# Altium PCB Driver.PcbDoc
Units mil, origin at the board's own origin, x right, y up, seen from the top; angles counter-clockwise.
Board outline 3410 x 1963 mil, 2 copper layers (Top Layer, Bottom Layer); 42 components, 50 nets, 167 pads, 24 vias.
Unrouted connection lines stored in the file: 40.
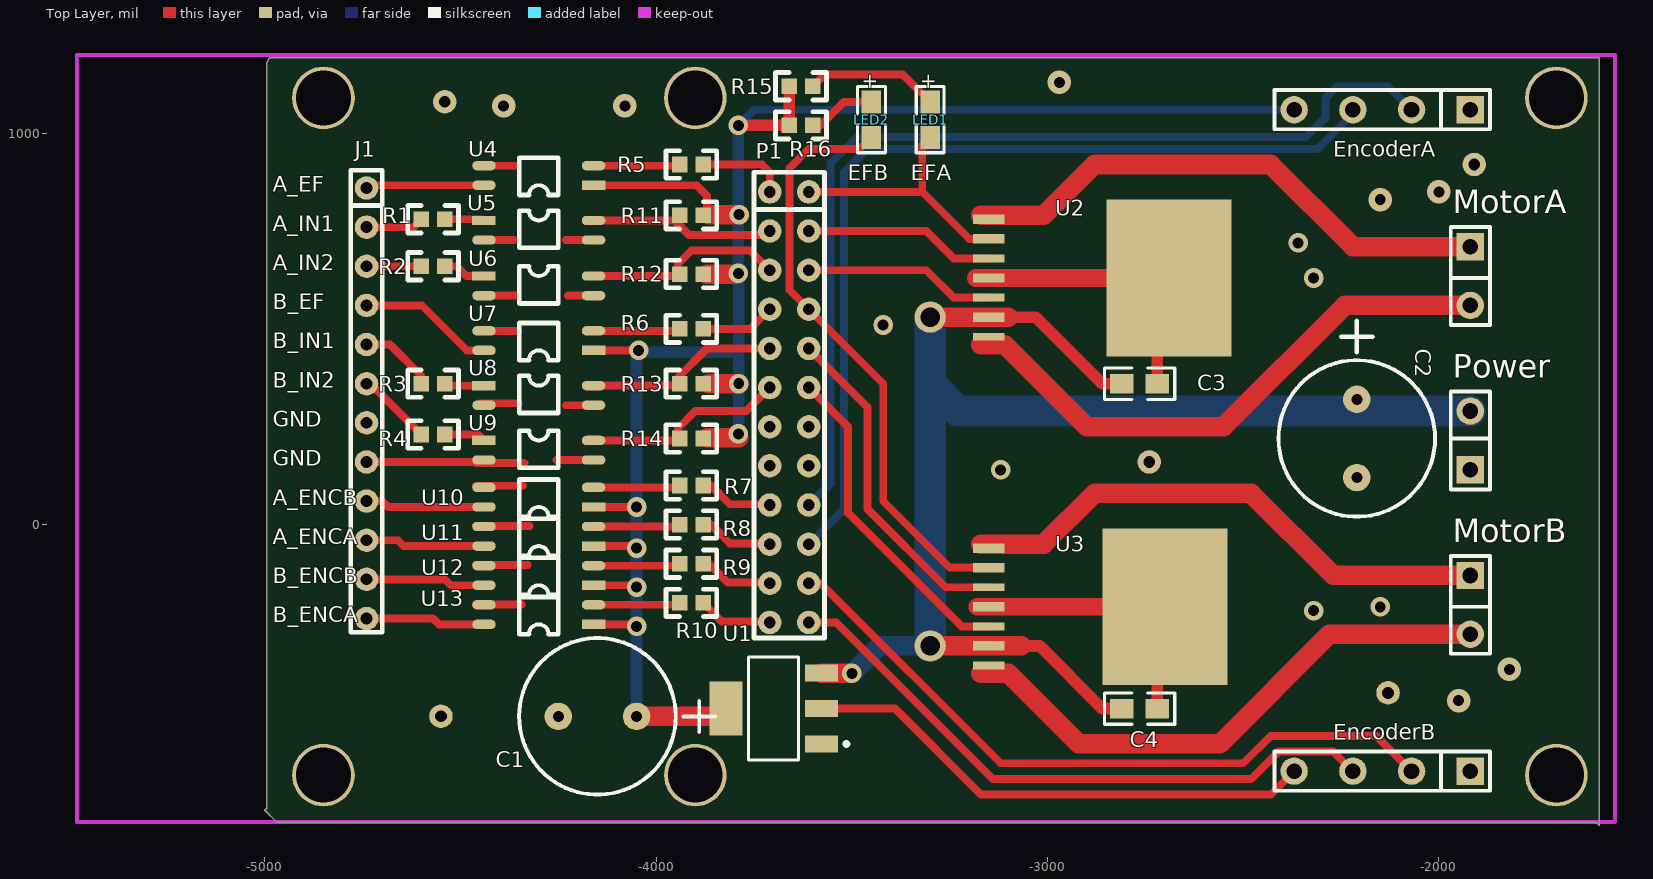
[diagram p0: Top Layer view]
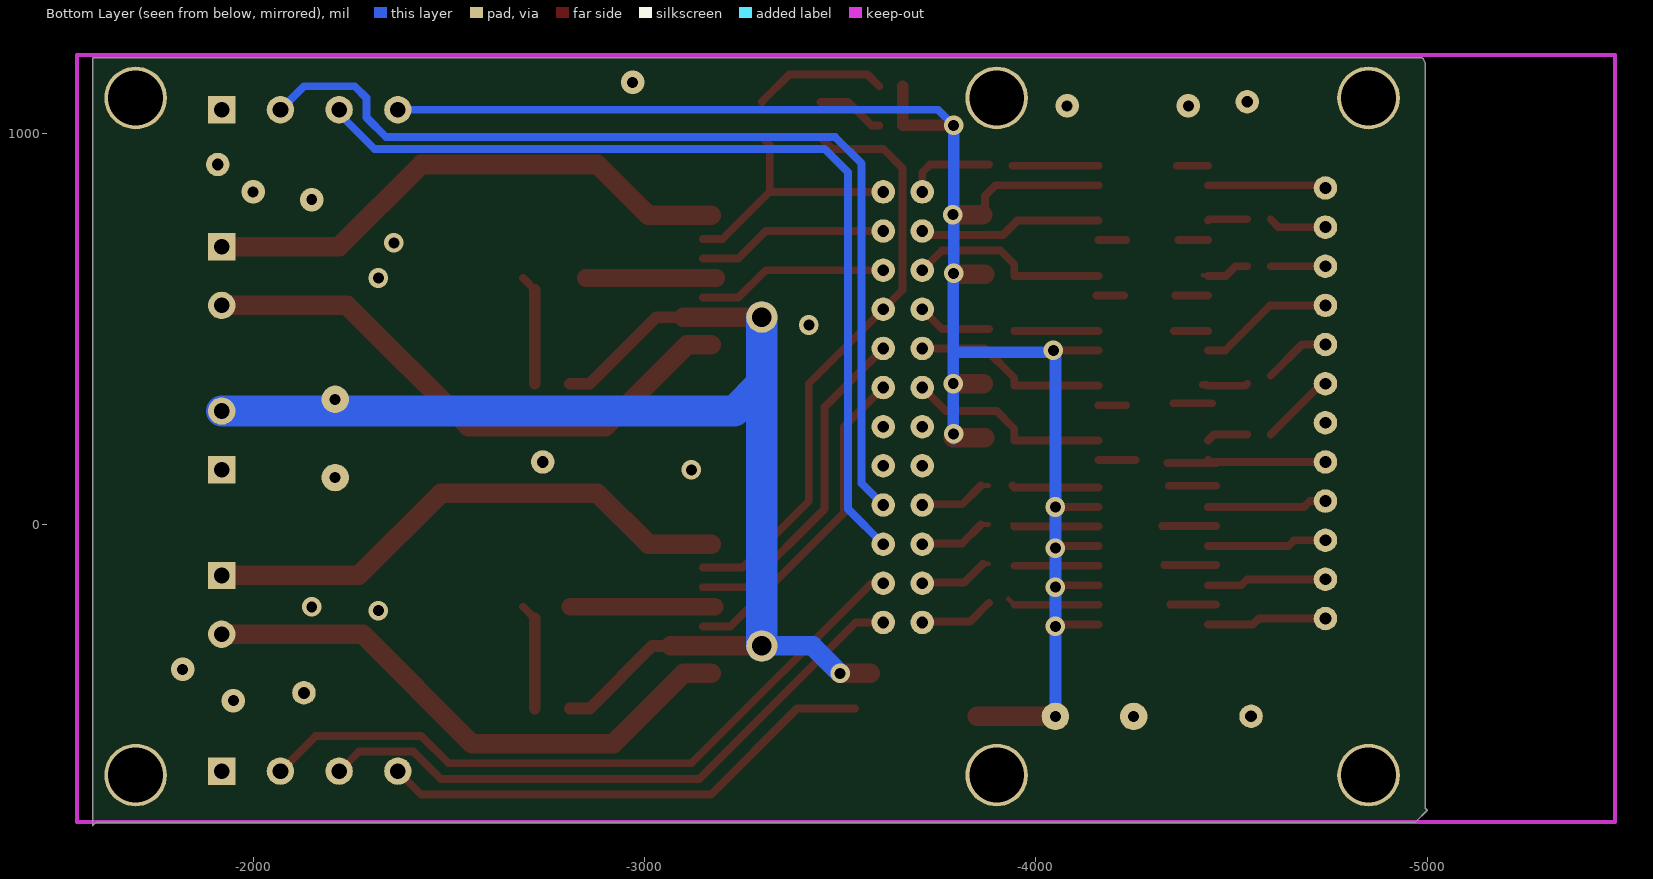
[diagram p1: Bottom Layer view, seen from below]

## Layer stack, top to bottom
Top Solder: solder mask 0.4, Solder Resist, Dk 3.5
Top Layer: signal copper 1.4
Dielectric1: dielectric 12.6, FR-4, Dk 4.8
Bottom Layer: signal copper 1.4
Bottom Solder: solder mask 0.4, Solder Resist, Dk 3.5

## Board outline
-4990,1190 -4987,1193 -1590,1193 -1590,-770 -1600,-760 -3320,-760 -4970,-760 -5000,-730 -4995,-725 -4995,1180

## Design rules (kind name [scope] priority, off if disabled: settings)
Clearance PAD_PAD [All] p1: gap=5
Clearance [All] p2: gap=11.81
FabricationTestPointUsage TestPointUsage [All] p1: valid=0 allowmultiple=FALSE
FabricationTestpoint Testpoint [All] p1: side=3 testpointundercomponent=TRUE minsize=40 maxsize=100 preferedsize=60 minholesize=0 maxholesize=40 preferedholesize=32 testpointgrid=1 allowsidetop=TRUE allowsidebottom=TRUE usegrid=TRUE gridtolerance=0.01
PolygonConnect [All] p1: connectstyle=Relief reliefconductorwidth=10 reliefentries=4 polygonreliefangle="90 Angle" airgapwidth=10
RoutingVias [All] p1: holewidth=15.75 width=50 viastyle="Through Hole" minholewidth=11.81 minwidth=50 maxholewidth=19.68 maxwidth=50
SolderMaskExpansion [All] p1: expansion=4
Width gnd [InNet('GND')] p1: maxlimit=200 minlimit=20 preferedwidth=20
Width singal [All] p2: maxlimit=200 minlimit=12 preferedwidth=20
Width vcc [InNet('VCC')] p3: maxlimit=120 minlimit=50 preferedwidth=120
27 further rules are at their usual default settings.

## Components (designator, comment, footprint, x,y, rotation, side; value= is the part's Value field where it differs from the comment)
C1 "22uF" RB.2/.4 -4150,-490 r0 top
C2 "10uF" RB.2/.4 -2210,220 r90 top
C3 "100nF" 0805 -2810,360 r0 top
C4 "100nF" 0805 -2810,-470 r0 top
EncoderA "EncoderA" SIP4-150 -1920,1060 r180 top
EncoderB "EncoderB" SIP4-150 -1920,-630 r180 top
J1 "CON12" si12 -4640,-40 r0 top
LED1 "EFA" LED-0805 -3300,1080 r270 top
LED2 "EFB" LED-0805 -3450,1080 r270 top
MotorA "MotorA" SIP2-150 -1920,710 r270 top
MotorB "MotorB" SIP2-150 -1920,-130 r270 top
P1 "Header 12X2A" si2333 -3650,310 r0 top
Power "Comment" SIP2-150 -1920,140 r90 top
R1 "390" 0603i -4540,780 r180 top
R2 "390" 0603i -4540,660 r180 top
R3 "390" 0603i -4540,360 r180 top
R4 "390" 0603i -4540,230 r180 top
R5 "390" 0603i -3880,920 r180 top
R6 "390" 0603i -3880,500 r180 top
R7 "390" 0603i -3880,100 r180 top
R8 "390" 0603i -3880,0 r180 top
R9 "390" 0603i -3880,-100 r180 top
R10 "390" 0603i -3880,-200 r180 top
R11 "2K" 0603i -3880,790 r180 top
R12 "2K" 0603i -3880,640 r180 top
R13 "2K" 0603i -3880,360 r180 top
R14 "2K" 0603i -3880,220 r180 top
R15 "2K" 0603i -3660,1120 r0 top
R16 "2K" 0603i -3660,1020 r0 top
U1 "LM217KC" SOT223 -3700,-470 r90 top
U2 "TLE5205-2G" INF-PG-TO263-7-1_L#1 -3150,630 r0 top
U3 "TLE5205-2G" INF-PG-TO263-7-1_L#2 -3150,-210 r0 top
U4 "Optoisolator1" TLP281 -4300,842 r180 top
U5 "Optoisolator1" TLP281 -4300,802 r0 top
U6 "Optoisolator1" TLP281 -4300,660 r0 top
U7 "Optoisolator1" TLP281 -4300,420 r180 top
U8 "Optoisolator1" TLP281 -4300,380 r0 top
U9 "Optoisolator1" TLP281 -4300,240 r0 top
U10 "Optoisolator1" TLP281 -4300,20 r180 top
U11 "Optoisolator1" TLP281 -4300,-80 r180 top
U12 "Optoisolator1" TLP281 -4300,-180 r180 top
U13 "Optoisolator1" TLP281 -4300,-280 r180 top

## Footprints (in the part's own frame and the unit in brackets; to place one, negate y for a bottom-side part, rotate by r counter-clockwise, add the part's x,y. Pads: shape width x height; smd on the part's side, far side on the other; paste and mask are expansions set on the pad)
0603i [mil]
  rect 40x40 smd: 1(0,0) 2(60,0)
  silkscreen extent -35,-35 95,35
0805 [mil]
  rect 60x50 smd: 1(0,0) 2(90,0)
  silkscreen extent -45,-40 135,40
INF-PG-TO263-7-1_L#1 [mil] "DPAK, 8-Leads, Body 10x9.25mm, Pitch 1.27mm, IPC High Density"
  rect 80x24 smd: 1(0,150) 2(0,100) 4(0,0) 6(0,-100)
  rect 80x20 smd: 3(0,50) 5(0,-50) 7(0,-150)
  rect 320x400 smd: 8(460,0)
INF-PG-TO263-7-1_L#2 [mil] "DPAK, 8-Leads, Body 10x9.25mm, Pitch 1.27mm, IPC High Density"
  rect 80x24 smd: 1(0,150) 2(0,100) 4(0,0) 6(0,-100)
  rect 80x20 smd: 3(0,50) 5(0,-50) 7(0,-150)
  rect 320x400 smd: 8(450,0)
LED-0805 [mm]
  rect 1.5x1.27 smd: 1(0,0) 2(2.3,0)
  silkscreen extent -1,-0.9 3.3,0.9
RB.2/.4 [mil]
  round 70 hole 28: 1(100,0) 2(-100,0)
  silkscreen extent -200,-200 300,200
si12 [mil]
  round 60 hole 30: 1(-100,900) 2(-100,800) 3(-100,700) 4(-100,600) 5(-100,500) 6(-100,400) 7(-100,300) 8(-100,200) 9(-100,100) 10(-100,0) 11(-100,-100) 12(-100,-200)
  silkscreen extent -140,-235 -60,945
si2333 [mil]
  round 60 hole 30: 1(-60,540) 2(-60,440) 3(-60,340) 4(-60,240) 5(-60,140) 6(-60,40) 7(-60,-60) 8(-60,-160) 9(-60,-260) 10(-60,-360) 11(-60,-460) 12(-60,-560) 13(40,540) 14(40,440) 15(40,340) 16(40,240) 17(40,140) 18(40,40) 19(40,-60) 20(40,-160) 21(40,-260) 22(40,-360) 23(40,-460) 24(40,-560)
  silkscreen extent -100,-600 80,590
SIP2-150 [mil]
  rect 70x70 hole 40: 1(0,0)
  round 70 hole 40: 2(150,0)
  silkscreen extent -50,-50 200,50
SIP4-150 [mil]
  rect 70x70 hole 40: 1(0,0)
  round 70 hole 40: 2(150,0) 3(300,0) 4(450,0)
  silkscreen extent -50,-50 500,50
SOT223 [mm] "SOT-223/SC-73; 4 Leads; Body 6.7 x 7.3 mm, inc. leads (LxW max)"
  rect 1.1x2.15 smd: 1(-2.3,-3.1) 2(0,-3.1) 3(2.3,-3.1)
  rect 3.5x2.15 smd paste+0: 4(0,3.1)
  silkscreen extent -3.35,-4.85 3.35,1.62
TLP281 [mil] "4"
  rect 60x24 smd: 1(-140,-25)
  oval 60x24 smd: 2(-140,-75) 3(140,-75) 4(140,-25)
  silkscreen extent -50,-95 50,0

## Part data
C1 C2: library part 电解电容, "Capacitor"
C3 C4: library part 普通电容, "Capacitor"
EncoderA EncoderB: library part "Header 4", "Header, 4-Pin"
J1: "Connector"
LED1 LED2 R1 R2 R3 R4 R5 R6 R7 R8 R9 R10 R11 R12 R13 R14 R15 R16: library part RES
MotorA MotorB: library part "Header 2", "Header, 2-Pin"
P1: "Header, 12-Pin, Dual row"
U1: "3-Terminal Adjustable Regulator"
U2 U3: "5 A H-Bridge for DC-Motor Applications, 6 to 40 V, 220 mOhm RDS(on), PG-TO263-7-1, Reel, Green"
U4 U5 U6 U7 U8 U9 U10 U11 U12 U13: "4-Pin Phototransistor Optocoupler"

## Free pads (board coordinates)
  round 160 hole 140: 0(-4850,-640) 1(-4850,1090) 2(-1700,1090) 3(-1700,-640) 4(-3900,1090) 5(-3900,-640)
  round 80 hole 50: 0(-3300,530) 2(-3300,-310)
  round 60 hole 30: 0(-2740,160) 1(-4550,-490) 5(-2130,-430) 5(-1910,920) 8(-4540,1080)

## Via types
v1: diameter 50, hole 28, Top Layer to Bottom Layer, 17 vias
v2: diameter 60, hole 28, Top Layer to Bottom Layer, 7 vias

## Nets (pads, with @x,y where several pads share a name; then routed paths per layer and width w, separated by ;. In a path a pad name is that pad's centre, name@x,y a point inside that pad or via, vN(x,y) a via of type N, cw(c..) or ccw(c..) an arc to the next point about the centre after c; other vN are vias at no path point)
5V: C1.1 EncoderA.4 EncoderB.4 R11.1 R12.1 R13.1 R14.1 R15.1 R16.1 U1.2 U1.4 U4.1 U7.1 U10.1 U11.1 U12.1 U13.1 | length 6402.5
  Top Layer w12: v1(-3790,232) v1@-3788,234
  Top Layer w20: U13.1 v1@-4040,-255 ; U12.1 v1@-4040,-155 ; U11.1 v1@-4040,-55 ; U10.1 v1@-4040,45 ; U7.1 v1@-4050,445 ; U4.1 -3897,867 -3870,840 R11.1@-3870,790 ; U1.2@-3537.95,-470 -3390,-470 -3170,-690 -2430,-690 EncoderB.4
  Top Layer w30: v1(-3790,1020) R16.1 R15.1
  Top Layer w50: C1.1 U1.4@-3850,-490 ; R14.1@-3870,222 v1@-3789,222 ; R12.1@-3870,640 v1@-3796,640 ; R13.1@-3865,360 v1(-3789,360) ; R11.1@-3864,792 v1(-3788,792)
  Bottom Layer w20: v1(-3790,1020) -3750,1060 EncoderA.4
  Bottom Layer w30: C1.1 v1(-4050,-260) v1(-4050,-160) v1(-4050,-60) v1(-4050,45) -4050,440 -3789,440 ; v1(-3790,642) v1(-3790,1020) ; v1@-3789,220 v1(-3789,360) -3789,440 ; v1@-3789,652 -3789,440
  other v1: -4045,445 -3420,510
GND: C1.2 C2.2 C3.2 C4.2 EncoderA.1 EncoderB.1 pad.0@-2740,160 pad.1@-4550,-490 pad.5@-1910,920 pad.5@-2130,-430 pad.8 Power.1 U1.1 U2.4 U2.8 U3.4 U3.8 U5.3 U6.3 U8.3 U9.3 | length 1562.8
  Top Layer w20: -4255,165 U9.3 ; -4230,305 U8.3 ; -4230,727 U5.3 ; -4225,585 U6.3@-4155,585 ; U3.8@-2720,-240 U3.8@-2690,-210 ; U2.8@-2720,600 U2.8
  Top Layer w30: C4.2 U3.8@-2720,-240 ; C3.2 U2.8@-2720,600
  Top Layer w45: U2.4@-3183.94,630 U2.8@-2850,630 ; U3.4@-3180,-210 U3.8@-2811,-210
  other v1: -2320,-220 -2150,-210 -3120,140 -2320,630 -2360,720
  other v2: -1950,-450 -1820,-370 -2150,830 -2000,850 -4390,1070 -4080,1070 -2970,1130
NetEncoderA_2: EncoderA.2 P1.21 | length 2516.1
  Bottom Layer w20: P1.21 -3555,105 -3555,922.34 -3487.34,990 -2340,990 -2290,1040 -2290,1090 -2260,1120 -2130,1120 EncoderA.2
NetEncoderA_3: EncoderA.3 P1.22 | length 2359.4
  Bottom Layer w20: P1.22 -3520,40 -3520,900 -3460,960 -2310,960 -2220,1050 EncoderA.3
NetEncoderB_2: EncoderB.2 P1.23 | length 1796.8
  Top Layer w20: P1.23 -3580,-150 -3120,-610 -2500,-610 -2430,-540 -2160,-540 EncoderB.2
NetEncoderB_3: EncoderB.3 P1.24 | length 1605.4
  Top Layer w20: P1.24 -3540,-250 -3140,-650 -2480,-650 -2410,-580 -2270,-580 EncoderB.3
NetJ1_1: J1.1 U4.4 | length 302.9
  Top Layer w20: J1.1 -4733,867 U4.4
NetJ1_2: J1.2 R1.2 | length 148.3
  Top Layer w19.68: J1.2 -4620,760 R1.2
NetJ1_3: J1.3 R2.2 | length 140
  Top Layer w19.68: J1.3 R2.2
NetJ1_4: J1.4 U7.4 | length 347.6
  Top Layer w20: J1.4 -4598.79,560 -4483.79,445 U7.4
NetJ1_5: J1.5 R3.2 | length 173.1
  Top Layer w19.68: J1.5 -4680,460 -4600,380
NetJ1_6: J1.6 R4.2 | length 193.8
  Top Layer w12: J1.6 J1.6@-4730,360
  Top Layer w20: J1.6@-4730,360 R4.2
NetJ1_9: J1.9 U10.4 | length 306.2
  Top Layer w20: J1.9 -4700,60 -4685,45 U10.4
NetJ1_10: J1.10 U11.4 | length 306.2
  Top Layer w20: J1.10 -4660,-40 -4645,-55 U11.4
NetJ1_11: J1.11 U12.4 | length 306.2
  Top Layer w20: J1.11 -4540,-140 -4525,-155 U12.4
NetJ1_12: J1.12 U13.4 | length 306.2
  Top Layer w20: J1.12 -4570,-240 -4555,-255 U13.4
NetLED1_1: LED1.1 R15.2 | length 341.4
  Top Layer w20: R15.2 -3570,1150 -3370,1150 LED1.1
NetLED1_2: LED1.2 P1.13 U2.2 | length 657.4
  Top Layer w20: P1.13 -3320,850 ; LED1.2 -3320,969.45 -3320,850 ; U2.2 -3200,730 -3320,850
NetLED2_1: LED2.1 R16.2 | length 174.9
  Top Layer w20: R16.2 -3580,1020 -3520,1080 LED2.1
NetLED2_2: LED2.2 P1.16 U3.2 | length 1531.9
  Top Layer w20: LED2.2 -3479.45,960 -3610,960 -3659,911 -3659,599 P1.16 -3420,360 -3420,60 -3250,-110 U3.2
NetMotorA_1: MotorA.1 U2.1 | length 1390.8
  Top Layer w50: U2.1@-3170,790 -3010,790 -2880,920 -2430,920 -2220,710 MotorA.1
NetMotorA_2: MotorA.2 U2.7 | length 1465.4
  Top Layer w50: -3170,460 -3110,460 -2900,250 -2550,250 -2240,560 MotorA.2
NetMotorB_1: MotorB.1 U3.1 | length 1390.8
  Top Layer w50: U3.1@-3170,-50 -3010,-50 -2880,80 -2480,80 -2270,-130 MotorB.1
NetMotorB_2: MotorB.2 U3.7 | length 1440.5
  Top Layer w50: -3170,-380 -3100,-380 -2920,-560 -2560,-560 -2280,-280 MotorB.2
NetP1_1: P1.1 R5.1 | length 232.5
  Top Layer w12: P1.1@-3705,860 P1.1@-3702,857
  Top Layer w20: R5.1 -3730,920 -3710,900 P1.1
NetP1_2: P1.2 R11.2 U5.4 | length 469.5
  Top Layer w20: U5.4 -3953,777 -3916,740 -3720,740 P1.2
NetP1_3: P1.3 R12.2 U6.4 | length 515.2
  Top Layer w20: U6.4 -3945,635 -3945,665 -3910,700 -3760,700 P1.3
NetP1_4: P1.4 R6.1 | length 190.7
  Top Layer w20: R6.1 -3760,500 P1.4
NetP1_5: P1.5 R13.2 U8.4 | length 501.1
  Top Layer w20: U8.4 -3945,355 -3945,375 -3870,450 P1.5
NetP1_6: P1.6 R14.2 U9.4 | length 523.5
  Top Layer w20: U9.4 -3945,215 -3945,245 -3900,290 -3770,290 P1.6
NetP1_9: P1.9 R7.1 | length 200
  Top Layer w12: R7.1 -3860,100 ; P1.9@-3707,52 P1.9@-3702,57
  Top Layer w20: -3860,100 -3812,52 P1.9@-3707,52
NetP1_10: P1.10 R8.1 | length 200
  Top Layer w12: R8.1 -3860,0 ; P1.10@-3707,-48 P1.10@-3702,-43
  Top Layer w20: -3860,0 -3812,-48 P1.10@-3707,-48
NetP1_11: P1.11 R9.1 | length 200
  Top Layer w12: R9.1 R9.1@-3865,-100 ; P1.11@-3707,-148 P1.11@-3702,-143
  Top Layer w20: R9.1@-3865,-100 -3817,-148 P1.11@-3707,-148
NetP1_12: P1.12 R10.1 | length 195
  Top Layer w12: P1.12@-3712,-248 P1.12@-3707,-243
  Top Layer w20: R10.1 -3832,-248 P1.12@-3712,-248
NetP1_14: P1.14 U2.3 | length 489
  Top Layer w20: P1.14 -3310,750 -3240,680 U2.3
NetP1_15: P1.15 U2.5 | length 489
  Top Layer w20: P1.15 -3310,650 -3240,580 U2.5
NetP1_17: P1.17 U3.3 | length 865
  Top Layer w20: P1.17 -3460,300 -3460,40 -3260,-160 U3.3
NetP1_18: P1.18 U3.5 | length 841.5
  Top Layer w20: P1.18 -3510,250 -3510,30 -3220,-260 U3.5
NetR1_1: R1.1 U5.1 | length 101.2
  Top Layer w19.68: R1.1 -4443,780 U5.1
NetR2_1: R2.1 U6.1 | length 133
  Top Layer w12: U6.1@-4449,637 U6.1@-4426.4,637
  Top Layer w20: R2.1 -4510,660 -4485,635 U6.1
NetR3_1: R3.1 U8.1 | length 112.7
  Top Layer w19.68: R3.1 -4535,355 U8.1 ; U8.1@-4437,357 U8.1@-4426.4,357
NetR4_1: R4.1 U9.1 | length 106.2
  Top Layer w20: R4.1 -4455,230 U9.1
NetR5_2: R5.2 U4.2 | length 220
  Top Layer w20: U4.2 R5.2@-3940,917
NetR6_2: R6.2 U7.2 | length 215
  Top Layer w20: U7.2 R6.2@-3945,495
NetR7_2: R7.2 U10.2 | length 222.1
  Top Layer w20: U10.2 -3945,95 R7.2
NetR8_2: R8.2 U11.2 | length 222.1
  Top Layer w12: R8.2@-3945,-5 R8.2
  Top Layer w20: U11.2 R8.2@-3945,-5
NetR9_2: R9.2 U12.2 | length 215
  Top Layer w20: U12.2 R9.2@-3945,-105
NetR10_2: R10.2 U13.2 | length 236.3
  Top Layer w12: R10.2@-3945,-205 R10.2@-3939.92,-199.92 ; R10.2 R10.2@-3930,-190
  Top Layer w20: U13.2 R10.2@-3945,-205
SGND: J1.7 J1.8 U4.3 U5.2 U6.2 U7.3 U8.2 U9.2 U10.3 U11.3 U12.3 U13.3 | length 1354.9
  Top Layer w20: J1.8 -4445,160 U9.2 ; U13.3@-4460,-204 -4343.4,-204 ; U12.3@-4460,-103 -4328,-103 ; U11.3@-4460,-4 -4323,-4 ; U10.3@-4460,99 -4340.4,99 ; U9.2@-4460,157 -4336.4,157 ; U8.2@-4450,310 -4351.4,310 ; U7.3 -4353,495 ; U6.2 -4357,585 ; U5.2 -4364.6,727 ; U4.3 -4360,917
VSS: C2.1 C3.1 C4.1 pad.0@-3300,530 pad.2@-3300,-310 Power.2 U1.3 U2.6 U3.6 | length 3662.1
  Top Layer w30: -3100,530 -3030,530 -2860,360 C3.1 ; -3067,-310 -3020,-310 -2860,-470 C4.1
  Top Layer w50: U1.3@-3577.4,-380 v1(-3500,-380) ; pad.2@-3300,-310 U3.6 -3067,-310 ; pad.0@-3290,530 U2.6 -3100,530
  Bottom Layer w50: v1(-3500,-380) -3430,-310 pad.2@-3300,-310
  Bottom Layer w80: pad.2@-3300,-310 -3300,360 ; pad.0@-3300,530 -3300,360 ; Power.2 -3230,290 -3300,360
pads on no net: P1.7 P1.8 P1.19 P1.20

## Keep-outs
Keep-Out Layer:
  lines w10: -5480,-760 -1550,-760 -1550,1200 -5480,1200 -5480,-760

## Silkscreen, mask and mechanical layers (free items; w line width, h text height)
Top Overlay:
  text "A_EF" at -4980,850 h40
  text "A_IN1" at -4980,750 h40
  text "A_IN2" at -4980,650 h40
  text "B_EF" at -4980,550 h40
  text "B_IN1" at -4980,450 h40
  text "B_IN2" at -4980,350 h40
  text "GND" at -4980,250 h40
  text "GND" at -4980,150 h40
  text "A_ENCB" at -4980,50 h40
  text "A_ENCA" at -4980,-50 h40
  text "B_ENCB" at -4980,-150 h40
  text "B_ENCA" at -4980,-250 h40

## Text inside footprints (layer, text, board x,y; h text height)
LED1: Top Overlay "+" at -3319.68,1154.8 h39.37 r270
LED2: Top Overlay "+" at -3469.68,1154.8 h39.37 r270